# Altium PCB RX_Banda_Aerea_v5.PcbDoc
Units mm, origin at the board's own origin, x right, y up, seen from the top; angles counter-clockwise.
Board outline 51.56 x 51.69 mm, 2 copper layers (Top Layer, Bottom Layer), stack 1.571 mm thick; 89 components, 45 nets, 214 pads, 83 vias.
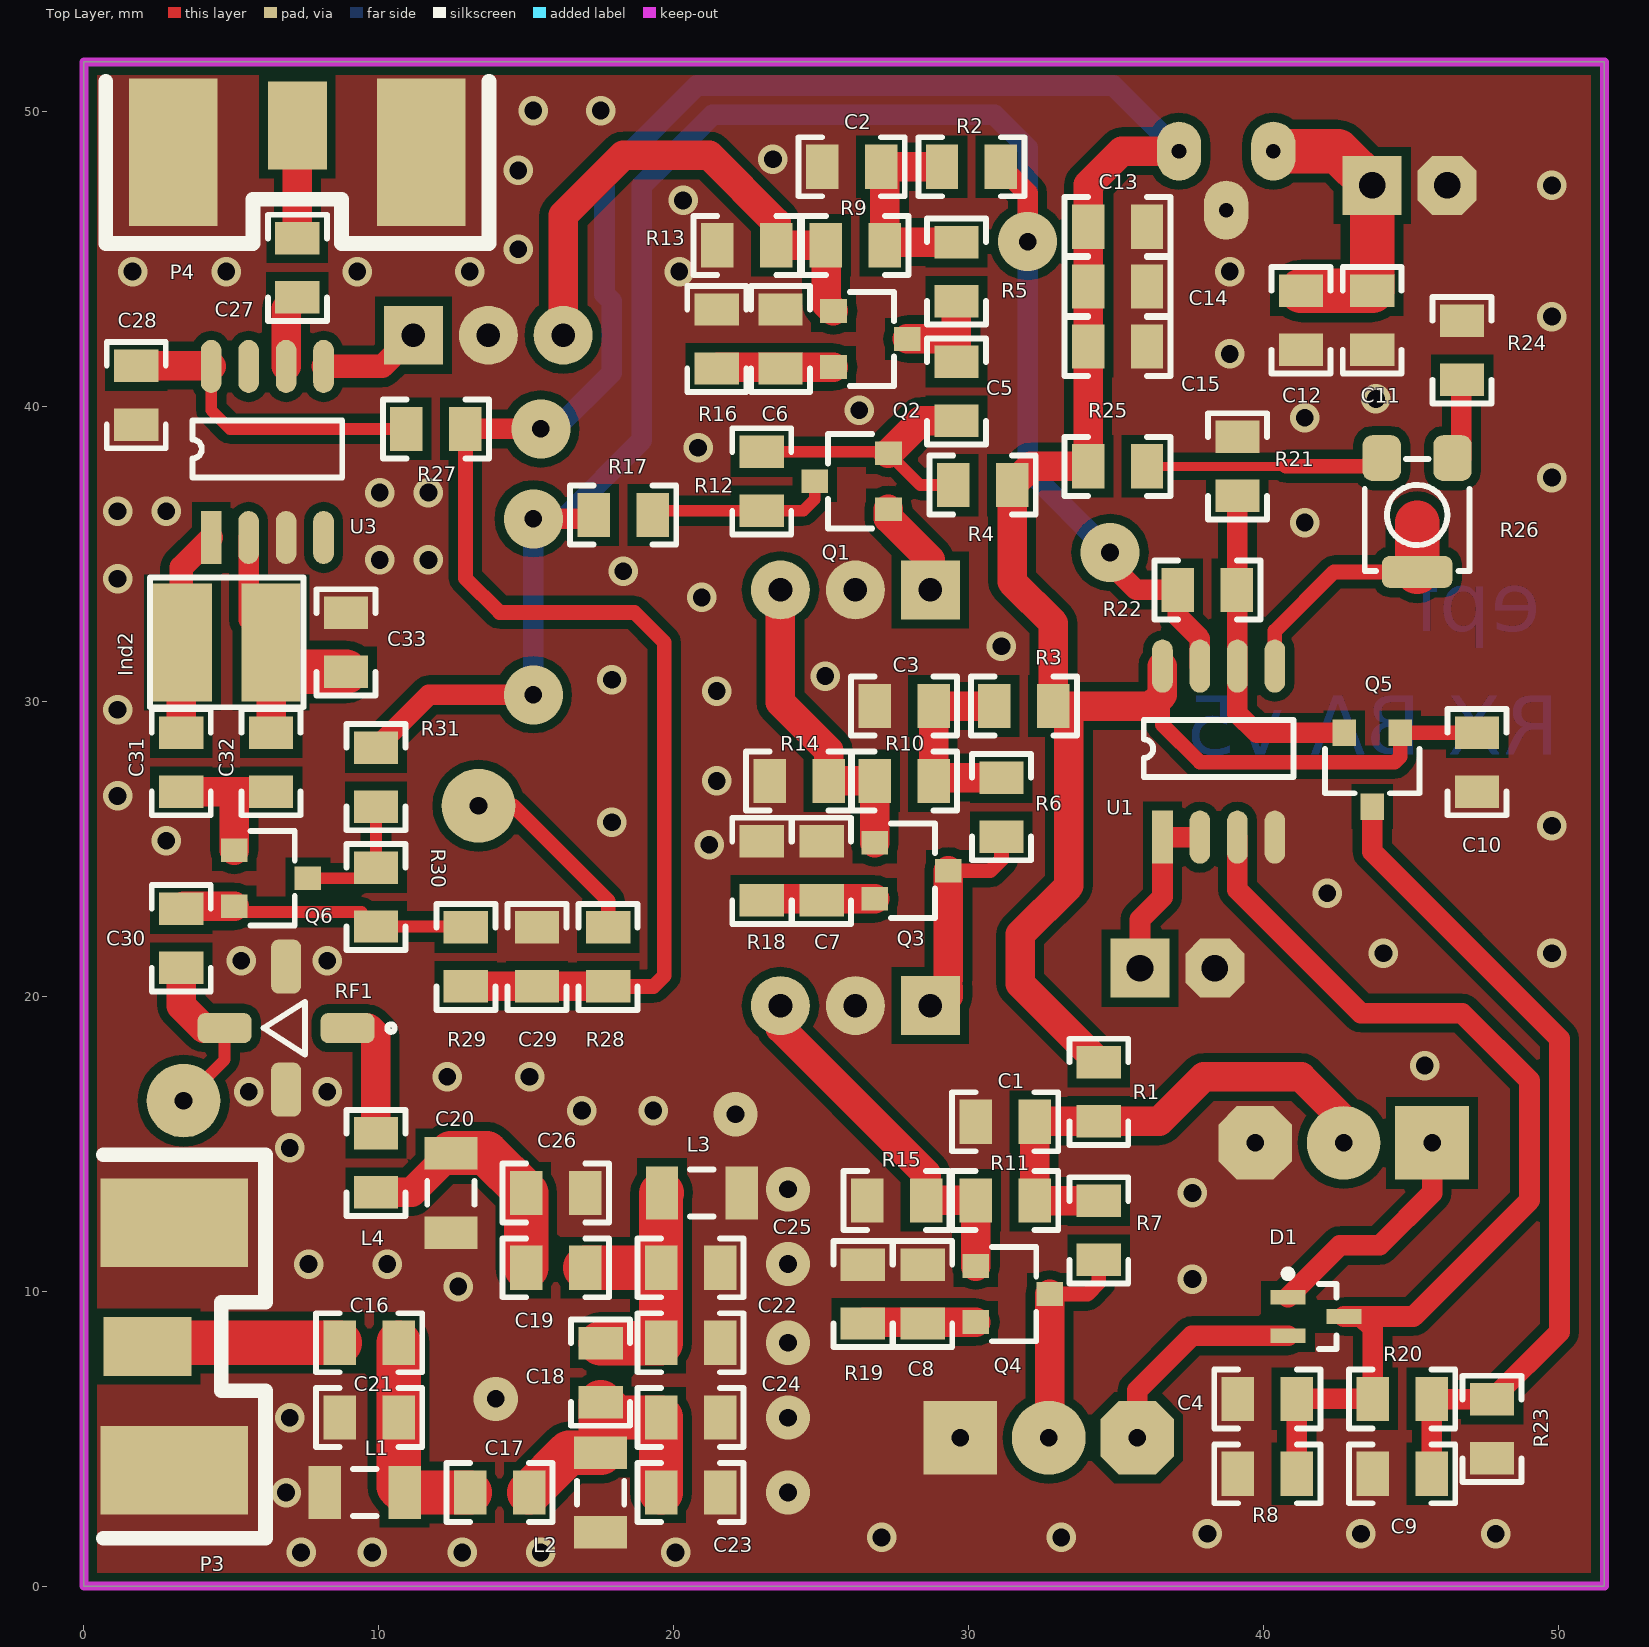
[diagram p0: Top Layer view]
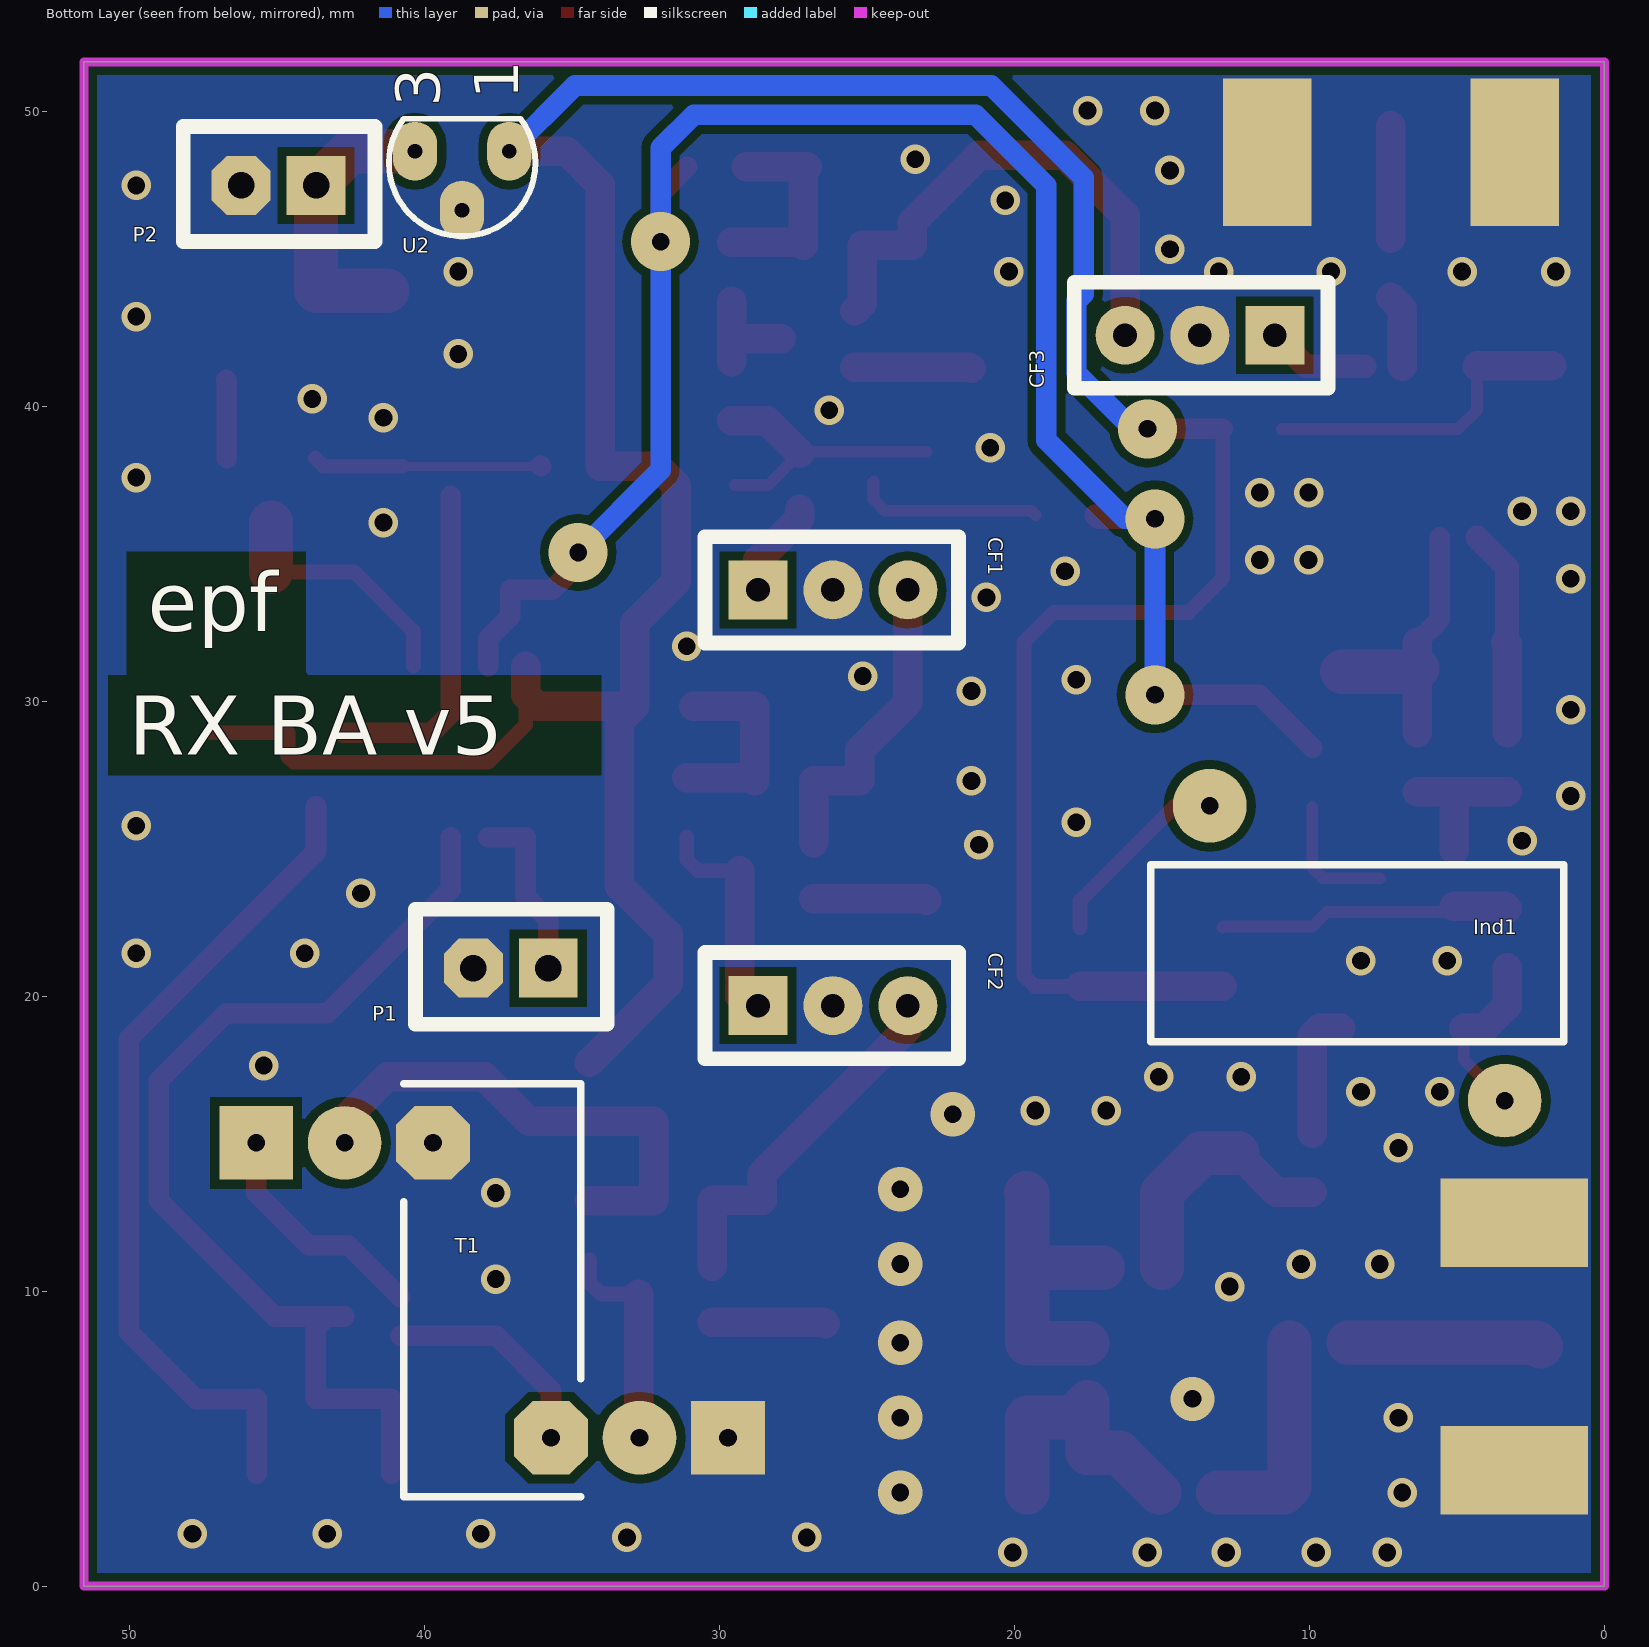
[diagram p1: Bottom Layer view, seen from below]

## Layer stack, top to bottom
Top Layer: signal copper 0.0356
Dielectric: core 1.5, FR-4, Dk 4.8
Bottom Layer: signal copper 0.0356

## Board outline
0,0 51.562,0 51.562,51.689 0,51.689

## Design rules (kind name [scope] priority, off if disabled: settings)
Clearance [All] p1: gap=0.3
Height [All] p1: minheight=0 maxheight=90 prefheight=12.7
PolygonConnect [All] p1: connectstyle=Direct reliefconductorwidth=0.254 reliefentries=4 polygonreliefangle="90 Angle"
RoomDefinition RXBA [InComponentClass('Components Class 1')] p1: confinementstyle=ConfineIn formatcopy=TRUE lockcomponents=TRUE outline -23.749,62.611 52.832,62.611 52.832,-0.889 -23.749,-0.889
RoutingVias [All] p1: holewidth=0.635 width=2 viastyle="Through Hole" minholewidth=0.5 minwidth=1.27 maxholewidth=1 maxwidth=3
SilkToSilkClearance [All] p1: silktosilkclearance=0
SilkscreenOverComponentPads [All] p1: minsilkscreentomaskgap=0
SolderMaskExpansion [All] p1: expansion=0.102
TestPointUsage FabricationTestPointUsage [All] p1: valid=0 allowmultiple=FALSE
Testpoint FabricationTestpoint [All] p1: side=3 testpointundercomponent=TRUE minsize=1.016 maxsize=2.54 preferedsize=1.524 minholesize=0 maxholesize=1.016 preferedholesize=0.813 testpointgrid=0.025 style=297 order=0-112345678
Width [All] p1: maxlimit=3 minlimit=0.3 preferedwidth=1
21 further rules are at their usual default settings.

## Classes and differential pairs
component class Ampli_FI_10_7MHz: C1 C2 C3 C4 C5 C6 C7 C8 C9 C10 C11 C12 C13 C14 C15 CF1 CF2 CF3 D1 P1 P2 Q1 Q2 Q3 Q4 Q5 R1 R2 R3 R4 R5 R6 R7 R8 R9 R10 R11 R12 R13 R14 R15 R16 R17 R18 R19 R20 R21 R22 R23 R24 R25 R26 T1 U1 U2
component class FiltroRF: C16 C17 C18 C19 C20 C21 C22 C23 C24 C25 C26 C27 C28 C29 C30 C31 C32 C33 Ind1 Ind2 L1 L2 L3 L4 P3 P4 Q6 R27 R28 R29 R30 R31 RF1 U3

## Components (designator, comment, footprint, x,y, rotation, side; value= is the part's Value field where it differs from the comment)
C1 "Capacitor" 0805_CAP 31.242,15.748 r0 top
C2 "Capacitor" 0805_CAP 26.035,48.133 r180 top
C3 "Capacitor" 0805_CAP 27.813,29.845 r180 top
C4 "Capacitor" 0805_CAP 40.132,6.35 r0 top
C5 "Capacitor" 0805_CAP 29.591,40.513 r90 top
C6 "Capacitor" 0805_CAP 23.622,42.291 r90 top
C7 "Capacitor" 0805_CAP 25.019,24.257 r90 top
C8 "Capacitor" 0805_CAP 28.448,9.906 r270 top
C9 "Capacitor" 0805_CAP 44.704,3.81 r0 top
C10 "Capacitor" 0805_CAP 47.244,27.94 r90 top
C11 "Capacitor" 0805_CAP 43.688,42.926 r90 top
C12 "Capacitor" 0805_CAP 41.275,42.926 r90 top
C13 "Capacitor" 0805_CAP 35.052,46.101 r180 top
C14 "Capacitor" 0805_CAP 35.052,44.069 r180 top
C15 "Capacitor" 0805_CAP 35.052,42.037 r180 top
C16 "Capacitor" 0805_CAP 9.675,8.255 r180 top
C17 "Capacitor" 0805_CAP 14.097,3.175 r180 top
C18 "Capacitor" 0805_CAP 17.526,7.239 r90 top
C19 "Capacitor" 0805_CAP 16.002,10.795 r180 top
C20 "Capacitor" 0805_CAP 9.906,14.351 r270 top
C21 "Capacitor" 0805_CAP 9.675,5.715 r180 top
C22 "Capacitor" 0805_CAP 20.574,8.255 r180 top
C23 "Capacitor" 0805_CAP 20.574,3.175 r180 top
C24 "Capacitor" 0805_CAP 20.574,5.715 r180 top
C25 "Capacitor" 0805_CAP 20.574,10.795 r180 top
C26 "Capacitor" 0805_CAP 16.002,13.335 r0 top
C27 "Capacitor" 0805_CAP 7.239,44.704 r90 top
C28 "Capacitor" 0805_CAP 1.778,40.386 r90 top
C29 "Capacitor" 0805_CAP 15.367,21.336 r270 top
C30 "Capacitor" 0805_CAP 3.302,21.971 r270 top
C31 "Capacitor" 0805_CAP 3.302,27.94 r270 top
C32 "Capacitor" 0805_CAP 6.35,27.94 r90 top
C33 "Capacitor" 0805_CAP 8.89,32.004 r90 top
CF1 "Filtro_ceramico" Filter_10_7 28.702,33.782 r180 bottom
CF2 "Filtro_ceramico" Filter_10_7 28.702,19.685 r180 bottom
CF3 "Filtro_ceramico" Filter_10_7 11.176,42.418 r0 bottom
D1 "BAS70-05W" SOT323_N 41.783,9.144 r0 top
Ind1 "Ind2" NTH12_2 8.382,21.463 r0 bottom
Ind2 "Ind2" Ind_3mm 6.35,32.004 r180 top
L1 "Inductor" INDC3216AL 9.525,3.175 r0 top
L2 "Inductor" INDC3216AL 17.526,3.175 r90 top
L3 "Inductor" INDC3216AL 20.955,13.335 r180 top
L4 "Inductor" INDC3216AL 12.446,13.335 r90 top
P1 "Header2" Header2Macho 35.814,20.955 r0 bottom
P2 "Header2" Header2Hembra 43.688,47.498 r0 bottom
P3 "SMA2" SMAL_Antena 2.159,8.128 r90 top
P4 "SMA2" SMAL2 7.239,49.53 r0 top
Q1 "PMBF4391" SOT23 26.035,37.465 r90 top
Q2 "BFS17" SOT23 26.67,42.291 r270 top
Q3 "BFS17" SOT23 28.067,24.257 r270 top
Q4 "BFS17" SOT23 31.496,9.906 r270 top
Q5 "PMBF4391" SOT23 43.688,27.686 r180 top
Q6 "PMBF4391" SOT23 6.35,24.003 r270 top
R1 "Resistor" 0805_RES 34.417,16.764 r270 top
R2 "Resistor" 0805_RES 30.099,48.133 r180 top
R3 "Resistor" 0805_RES 31.877,29.845 r180 top
R4 "Resistor" 0805_RES 30.48,37.338 r180 top
R5 "Resistor" 0805_RES 29.591,44.577 r270 top
R6 "Resistor" 0805_RES 31.115,26.416 r270 top
R7 "Resistor" 0805_RES 34.417,12.065 r270 top
R8 "Resistor" 0805_RES 40.132,3.81 r180 top
R9 "Resistor" 0805_RES 26.162,45.466 r180 top
R10 "Resistor" 0805_RES 27.813,27.305 r180 top
R11 "Resistor" 0805_RES 31.242,13.081 r180 top
R12 "Resistor" 0805_RES 22.987,37.465 r270 top
R13 "Resistor" 0805_RES 22.479,45.466 r180 top
R14 "Resistor" 0805_RES 24.257,27.305 r180 top
R15 "Resistor" 0805_RES 27.559,13.081 r180 top
R16 "Resistor" 0805_RES 21.463,42.291 r90 top
R17 "Resistor" 0805_RES 18.288,36.322 r180 top
R18 "Resistor" 0805_RES 22.987,24.257 r90 top
R19 "Resistor" 0805_RES 26.416,9.906 r90 top
R20 "Resistor" 0805_RES 44.704,6.35 r180 top
R21 "Resistor" 0805_RES 39.116,37.973 r270 top
R22 "Resistor" 0805_RES 38.1,33.782 r180 top
R23 "Resistor" 0805_RES 47.752,5.334 r270 top
R24 "Resistor" 0805_RES 46.736,41.91 r90 top
R25 "Resistor" 0805_RES 35.052,37.973 r0 top
R26 "Pot" POT_SMD 45.212,36.322 r180 top
R27 "Resistor" 0805_RES 11.938,39.243 r180 top
R28 "Resistor" 0805_RES 17.78,21.336 r270 top
R29 "Resistor" 0805_RES 12.954,21.336 r90 top
R30 "Resistor" 0805_RES 9.906,23.368 r270 top
R31 "Resistor" 0805_RES 9.906,27.432 r270 top
RF1 "MAR-1SM" WW107 6.858,18.923 r180 top
T1 "Transformer" NTH12_V_3Ind_2 37.719,10.033 r180 bottom
U1 "MC1458D" SO-8_2 36.576,25.4 r90 top
U2 "LM78L09ACZ" TO92 38.735,48.26 r90 bottom
U3 "SA602" SO-8_2 4.318,35.56 r90 top

## Footprints (in the part's own frame and the unit in brackets; to place one, negate y for a bottom-side part, rotate by r counter-clockwise, add the part's x,y. Pads: shape width x height; smd on the part's side, far side on the other; paste and mask are expansions set on the pad)
0805_CAP [mm]
  rect 1.1x1.5 smd: 1(-1,0) 2(1,0)
  silkscreen extent -1.8,-1 1.8,1, body extent -1,-0.62 1,0.63, height 0.78
0805_RES [mm]
  rect 1.1x1.5 smd: 1(-1,0) 2(1,0)
  silkscreen extent -1.8,-1 1.8,1, body extent -1,-0.62 1,0.63, height 0.78
Filter_10_7 [mm]
  rect 2x2 hole 0.8: 1(0,0)
  round 2 hole 0.8: 2(2.54,0) 3(5.08,0)
  silkscreen extent -1.8,-1.8 6.8,1.8
Header2Hembra [mm]
  rect 2x2 hole 0.9: 1(0,0)
  oct 2x2 hole 0.9: 2(2.54,0)
  silkscreen extent -2,-2 4.5,1.9, body extent -1.3,-1.3 3.78,1.24, height 6.02
Header2Macho [mm]
  rect 2x2 hole 0.9: 1(0,0)
  oct 2x2 hole 0.9: 2(2.54,0)
  silkscreen extent -2,-2 4.5,1.9, body extent -1.18,-1.21 3.82,1.29, height 8.2
Ind_3mm [mm]
  rect 2x4 smd: 1(0,0) 2(3,0)
  silkscreen extent -1.1,-2.2 4.1,2.2, body extent -0.2,-1.95 3.2,1.95, height 3.95
INDC3216AL [mm] "Chip Inductor, Body 3.2x1.6mm, IPC High Density"
  rect 1.1x1.8 smd: 1(-1.35,0) 2(1.35,0)
  silkscreen extent -0.4,-0.8 0.4,0.8, body extent -1.7,-0.9 1.7,0.9, height 0.55
NTH12_2 [mm]
  round 2.5 hole 0.6: 1(-5,5) 2(5,-5)
  silkscreen extent -7,-3 7,3
NTH12_V_3Ind_2 [mm]
  round 2.5 hole 0.6: 1(-5,5) 2(5,-5)
  rect 2.5x2.5 hole 0.6: 3(-8,5) 4(8,-5)
  oct 2.5x2.5 hole 0.6: 5(-2,5) 6(2,-5)
  silkscreen extent -3,-7 3,7
POT_SMD [mm]
  rrect50% 1.3x1.55 smd: 1(-1.2,-1.93) 2(1.2,-1.93)
  rrect50% 2.39x1.09 smd: 3(0,1.93)
  silkscreen extent -1.78,-1.91 1.78,1.91, body extent -1.52,-1.55 1.52,1.68, height 2
SMAL2 [mm]
  rect 3x5 smd: 0(-4.2,-0.9) 0(4.2,-0.9)
  rect 3x5 smd far side: 0(-4.2,-0.9) 0(4.2,-0.9)
  rect 2x3 smd: 1(0,0)
  silkscreen extent -6.5,-4 6.5,1.5, body extent -4.76,-2.97 4.76,10.86, height 4.06
SMAL_Antena [mm]
  rect 3x5 smd: 0(-4.2,-0.9) 0(4.2,-0.9)
  rect 3x5 smd far side: 0(-4.2,-0.9) 0(4.2,-0.9)
  rect 2x3 smd: 1(0,0)
  silkscreen extent -6.5,-4 6.5,1.5, body extent -4.76,-2.97 4.76,24.09, height 42.25
SO-8_2 [mm]
  rect 1.8x0.7 smd: 1(0,0)
  oval 1.8x0.7 smd: 2(0,-1.27) 3(0,-2.54) 4(0,-3.81) 5(5.8,-3.81) 6(5.8,-2.54) 7(5.8,-1.27) 8(5.8,0)
  silkscreen extent 2.03,-4.44 3.97,0.64, body extent -0.09,-4.38 5.9,0.52, height 1.6
SOT23 [mm]
  rect 0.8x0.9 smd: 1(-0.95,-1.25) 2(0.95,-1.25) 3(0,1.25)
  silkscreen extent -1.6,-0.7 1.6,0.8, body extent -1.5,-1.25 1.5,1.25, height 1.05
SOT323_N [mm] "SOT323, 3-Leads, Body 2.0x1.3mm, Pitch 0.65mm, Lead Span 2.1mm, IPC Medium Density"
  rect 1.2x0.5 smd: 1(-0.95,0.65) 2(-0.95,-0.65) 3(0.95,0)
  silkscreen extent -1.07,-1.1 0.7,1.57, body extent -0.7,-1.1 0.7,1.1, height 1.1
TO92 [mm] "TO, Flat Index; 3 In-Line, Axial Leads; Body Dia. 4.5mm; Leads 0.51 x 0.48 mm (max)"
  oval 2x1.5 hole 0.5: 1(0.4,-1.6) 2(-1.6,0) 3(0.4,1.6)
  silkscreen extent -2.48,-2.48 1.5,2.48
WW107 [mm] "MAR-1"
  rrect50% 1.83x1.02 smd: 1(-2.085,0) 3(2.085,0)
  rrect50% 1.02x1.83 smd: 2(0,-2.085) 4(0,2.085)
  silkscreen extent -3.68,-0.89 0.76,0.89, body extent -1.09,-1.09 1.09,1.09, height 1.52

## Part data
C1 C2 C3 C4 C5 C6 C7 C8 C9 C10 C11 C12 C13 C14 C15 C16 C17 C18 C19 C20 C21 C22 C23 C24 C25 C26 C27 C28 C29 C30 C31 C32 C33: library part Cap
CF1 CF2 CF3: library part Filter_10_7
D1: "Schottky Barrier Double Diode"
P3 P4: "BNC Elbow Connector"
Q1 Q5 Q6: "N-channel Silicon Junction Field-effect Transistor"
Q2 Q3 Q4: "NPN 1 GHz Wideband Transistor"
R1 R2 R3 R4 R5 R6 R7 R8 R9 R10 R11 R12 R13 R14 R15 R16 R17 R18 R19 R20 R21 R22 R23 R24 R25 R27 R28 R29 R30 R31: library part Res
T1: library part Transformador3, "Transformador 3 bobinas"
U1: "Dual Operational Amplifier, Internally Compensated"
U2: "3-Terminal Positive Regulators"
U3: library part SA602A, "Mezclador 500MHz"

## Via types
v1: diameter 1, hole 0.6, Top Layer to Bottom Layer, 71 vias
v2: diameter 1.5, hole 0.6, Top Layer to Bottom Layer, 7 vias
v3: diameter 2, hole 0.6, Top Layer to Bottom Layer, 5 vias

## Nets (pads, with @x,y where several pads share a name; then routed paths per layer and width w, separated by ;. In a path a pad name is that pad's centre, name@x,y a point inside that pad or via, vN(x,y) a via of type N, cw(c..) or ccw(c..) an arc to the next point about the centre after c; other vN are vias at no path point)
AUDIO: C4.2 D1.3 R8.1 R20.2 U1.3 | length 35
  Top Layer w0.7: U1.3 39.116,23.622 43.307,19.431 46.736,19.431 49.022,17.145 49.022,13.081 45.085,9.144 D1.3 43.307,9.144 43.704,8.747 R20.2 C4.2 R8.1
AUDIO_BUFF: P1.1 U1.1 U1.2 | length 6
  Top Layer w0.7: P1.1 35.814,22.606 36.576,23.368 U1.1 U1.2
CAG: R2.1 R17.2 R22.2 R31.1 U1.7 | length 65.8
  Top Layer w0.7: R31.1 11.7,30.226 v3(15.24,30.226) ; v3(15.24,36.195) 17.161,36.195 R17.2 ; R2.1 32.004,47.228 v3(32.004,45.593) ; v3(34.798,35.052) 34.798,34.671 35.687,33.782 R22.2 37.1,32.877 37.846,32.131 U1.7
  Bottom Layer w0.7: v3(15.24,30.226) v3(15.24,36.195) 16.256,36.195 18.923,38.862 18.923,47.498 21.314,49.889 30.883,49.889 32.004,48.768 v3(32.004,45.593) 32.004,37.846 v3(34.798,35.052)
FI: CF3.1 U3.5 | length 3.5
  Top Layer w0.8: U3.5 10.118,41.36 CF3.1
GND: C1.1 C2.2 C3.2 C4.1 C6.2 C7.2 C8.1 C9.1 C10.1 C11.1 C12.1 C13.1 C14.1 C15.1 C21.2 C22.1 C23.1 C24.1 C25.1 C26.2 C28.1 C29.1 C33.2 CF1.2 CF2.2 CF3.2 L1.1 L2.1 L3.1 L4.1 P1.2 P2.2 P3.0 P4.0 R8.2 R13.2 R14.2 R15.2 R16.2 R18.2 R19.2 R21.1 R23.2 R24.2 RF1.2 RF1.4 T1.4 T1.5 U1.4 U2.2 U3.3
  other v1: 7.366,1.143 9.779,1.143 12.827,1.143 15.494,1.143 20.066,1.143 27.051,1.651 33.147,1.651 38.1,1.778 43.307,1.778 47.879,1.778 6.858,3.175 6.985,5.715 12.7,10.16 37.592,10.414 7.62,10.922 10.287,10.922 37.592,13.335 6.985,14.859 16.891,16.129 19.304,16.129 5.588,16.764 8.255,16.764 12.319,17.272 15.113,17.272 45.466,17.653 5.334,21.209 8.255,21.209 44.069,21.463 49.784,21.463 42.164,23.495 21.209,25.146 2.794,25.273 49.784,25.781 17.907,25.908 1.143,26.797 21.463,27.305 1.143,29.718 21.463,30.353 17.907,30.734 25.146,30.861 31.115,31.877 20.955,33.528 1.143,34.163 18.288,34.417 10.033,34.798 11.684,34.798 41.402,36.068 1.143,36.449 2.794,36.449 10.033,37.084 11.684,37.084 49.784,37.592 20.828,38.608 41.402,39.624 26.289,39.878 43.815,40.259 38.862,41.783 49.784,43.053 1.651,44.577 4.826,44.577 9.271,44.577 13.081,44.577 20.193,44.577 38.862,44.577 14.732,45.339 20.32,46.99 49.784,47.498 14.732,48.006 23.368,48.387 15.24,50.038 17.526,50.038
  other v2: 23.876,3.175 23.876,5.715 13.97,6.35 23.876,8.255 23.876,10.922 23.876,13.462 22.098,16.002
NetC1_2: C1.2 R1.2 R7.1 R11.1 T1.1 | length 17.4
  Top Layer w1: R7.1 32.258,13.065 R11.1 C1.2 32.258,15.764 R1.2 36.465,15.764 37.973,17.272 41.275,17.272 42.719,15.828 T1.1
NetC2_1: C2.1 R2.2 R5.1 R9.1 | length 7.3
  Top Layer w1: R2.2 C2.1 27.162,48.006 R9.1 27.273,45.577 R5.1
NetC3_1: C3.1 R3.2 R6.1 R10.1 | length 7
  Top Layer w1: R3.2 C3.1 R10.1 28.924,27.416 R6.1
NetC5_1: C5.1 Q1.2 R4.2 R12.1 | length 9.7
  Top Layer w0.4: R12.1 27.235,38.465 Q1.2 28.362,37.338 R4.2
  Top Layer w1: Q1.2 28.383,39.513 C5.1
NetC5_2: C5.2 Q2.3 R5.2 | length 3.7
  Top Layer w1: Q2.3 29.591,42.291 ; C5.2 29.591,42.291 ; R5.2 29.591,42.291
NetC6_1: C6.1 Q2.2 R16.1 | length 4
  Top Layer w1: R16.1 21.513,41.341 Q2.2
NetC7_1: C7.1 Q3.2 R18.1 | length 3.9
  Top Layer w1: R18.1 23.037,23.307 Q3.2
NetC8_2: C8.2 Q4.2 R19.1 | length 3.9
  Top Layer w1: R19.1 26.466,8.956 Q4.2
NetC9_2: C9.2 Q5.3 R20.1 R23.1 | length 28.3
  Top Layer w0.7: Q5.3 43.688,24.912 50.038,18.562 50.038,8.62 R23.1 45.72,6.334 R20.1 C9.2
NetC11_2: C11.2 C12.2 P2.1 U2.3 | length 9.8
  Top Layer w1.5: U2.3 42.526,48.66 P2.1 C11.2 C12.2
NetC16_1: C16.1 C17.2 C21.1 L1.2 | length 7.4
  Top Layer w1.5: C16.1 C21.1 10.675,3.375 L1.2 C17.2
NetC17_1: C17.1 C18.1 C23.2 C24.2 L2.2 | length 9.5
  Top Layer w1.5: C17.1 16.447,4.525 L2.2 C18.1 18.05,5.715 C24.2 C23.2
NetC18_2: C18.2 C19.1 C22.2 C25.2 L3.2 | length 9.7
  Top Layer w1.5: C19.1 C25.2 ; C18.2 19.558,8.239 C22.2 C25.2 ; L3.2 19.574,13.304 C25.2
NetC19_2: C19.2 C20.2 C26.1 L4.2 | length 8.7
  Top Layer w1: C20.2 11.112,13.351 L4.2
  Top Layer w1.5: L4.2 13.652,14.685 C26.1 C19.2
NetC27_1: C27.1 U3.6 | length 2.5
  Top Layer w1: U3.6 6.858,43.323 C27.1
NetC27_2: C27.2 P4.1 | length 3.8
  Top Layer w1: C27.2 P4.1
NetC28_2: C28.2 R27.2 U3.8 | length 10.9
  Top Layer w0.4: U3.8 4.318,39.878 4.953,39.243 R27.2
  Top Layer w1: C28.2 4.292,41.386 U3.8
NetC30_1: C30.1 Q6.2 R29.2 R30.2 | length 10
  Top Layer w0.4: Q6.2 5.293,22.86 9.414,22.86 R30.2 12.922,22.368 R29.2
  Top Layer w1: C30.1 3.384,23.053 Q6.2
NetC30_2: C30.2 Ind1.1 RF1.3 | length 6.1
  Top Layer w0.4: Ind1.1 4.773,17.854 RF1.3
  Top Layer w1: C30.2 3.302,19.685 4.064,18.923 RF1.3
NetC31_1: C31.1 Ind2.2 U3.1 | length 7.1
  Top Layer w0.8: Ind2.2@3.302,31.956 3.302,34.544 U3.1
  Top Layer w1: C31.1 3.302,31.956 Ind2.2
NetC31_2: C31.2 C32.1 Q6.1 | length 5.1
  Top Layer w1: C31.2 5.207,26.94 ; Q6.1 5.1,26.833 5.207,26.94 ; C32.1 5.207,26.94
NetC32_2: C32.2 C33.1 Ind2.1 U3.2 | length 9.5
  Top Layer w0.7: U3.2 5.588,32.766 Ind2.1
  Top Layer w1: C32.2 6.35,31.115 Ind2.1
  Top Layer w1.5: Ind2.1@6.35,31.115 6.461,31.004 C33.1
NetCF1_1: CF1.1 Q1.1 | length 3.3
  Top Layer w1: Q1.1 27.285,36.215 28.702,34.798 CF1.1
NetCF1_3: CF1.3 Q3.1 R10.2 R14.1 | length 10.8
  Top Layer w1: CF1.3 23.622,29.972 25.257,28.337 R14.1 R10.2 26.817,27.301 Q3.1
NetCF2_1: CF2.1 Q3.3 R6.2 | length 7.9
  Top Layer w0.5: Q3.3 30.734,24.257 31.115,24.638 R6.2
  Top Layer w0.7: CF2.1 29.317,20.3 CF2.1@29.317,20.574
  Top Layer w1: CF2.1@29.317,20.006 CF2.1@29.317,20.3 ; CF2.1@29.317,20.574 Q3.3
NetCF2_3: CF2.3 Q4.1 R11.2 R15.1 | length 12.6
  Top Layer w1: CF2.3 23.622,18.923 28.559,13.986 R15.1 R11.2 30.246,13.077 Q4.1
NetCF3_3: CF3.3 Q2.1 R9.2 R13.1 | length 17.9
  Top Layer w1: CF3.3 16.256,46.482 18.288,48.514 21.209,48.514 23.479,46.244 R13.1 R9.2 25.172,45.456 25.172,43.489 Q2.1
NetD1_1: D1.1 T1.3 | length 8.1
  Top Layer w0.7: D1.1 42.596,11.557 43.942,11.557 45.719,13.334 T1.3
NetD1_2: D1.2 T1.6 | length 7.5
  Top Layer w0.7: T1.6 35.719,6.636 37.577,8.494 D1.2
NetInd1_2: Ind1.2 R28.1 | length 6.6
  Top Layer w0.5: Ind1.2 14.558,26.463 17.78,23.241 R28.1
NetQ1_3: Q1.3 R12.2 R17.1 | length 6.3
  Top Layer w0.4: R17.1 19.431,36.465 R12.2 24.4,36.465 24.785,36.85 Q1.3
NetQ4_3: Q4.3 R7.2 T1.2 | length 7.5
  Top Layer w0.5: Q4.3 34.036,9.906 34.417,10.287 R7.2
  Top Layer w1: T1.2 32.746,5.06 Q4.3
NetQ5_2: Q5.2 R21.2 R22.1 U1.6 | length 11.3
  Top Layer w0.7: R21.2 U1.6 39.116,29.591 39.771,28.936 Q5.2
NetQ6_3: Q6.3 R30.1 R31.2 | length 4.5
  Top Layer w0.4: Q6.3 9.541,24.003 R30.1 R31.2
NetR24_1: R24.1 R26.1 | length 2.7
  Top Layer w0.7: R26.1@46.712,38.252 46.712,40.886 R24.1
NetR25_2: R25.2 R26.2 | length 7.8
  Top Layer w0.3: R25.2 40.767,37.973
  Top Layer w0.5: 40.767,37.973 43.433,37.973 R26.2@43.712,38.252
  Top Layer w0.7: R25.2 R25.2@36.077,37.998
NetR26_3: R26.3 U1.5 | length 8.5
  Top Layer w0.5: U1.5 40.386,32.385 42.393,34.392 R26.3
  Top Layer w1.5: R26.3 45.212,36.068
RF_FILT: C20.1 RF1.1 | length 4.4
  Top Layer w1: RF1.1 9.652,18.923 9.906,18.669 C20.1
RF_IN: C16.2 P3.1 | length 6.6
  Top Layer w1.5: P3.1 2.286,8.255 C16.2
VCC: C10.2 C13.2 C14.2 C15.2 C29.2 Q5.1 R1.1 R3.1 R4.1 R25.1 R27.1 R28.2 R29.1 U1.8 U2.1 | length 122.1
  Top Layer w0.5: R27.1 12.938,34.179 14.097,33.02 18.669,33.02 19.685,32.004 19.685,20.701 19.32,20.336 R28.2 ; U1.8 36.576,29.21 37.85,27.936 44.446,27.936 44.638,28.128 Q5.1 44.642,28.94 C10.2
  Top Layer w0.7: R27.1 v3(15.494,39.243)
  Top Layer w1: R29.1 C29.2 R28.2 ; R1.1 31.75,20.431 31.75,22.098 33.401,23.749 33.401,29.321 R3.1 ; U1.8 36.576,30.226 36.195,29.845 R3.1 ; U2.1 35.198,48.66 34.052,47.514 C13.2 C14.2 C15.2 R25.1 32.115,37.973 R4.1 31.48,34.052 32.877,32.655 R3.1
  Bottom Layer w0.7: v3(15.494,39.243) 16.002,39.243 17.907,41.148 17.907,43.561 17.653,43.815 17.653,47.752 20.79,50.889 34.906,50.889 U2.1
pads on no net: U3.4 U3.7

## Polygon pours and split planes (outlines as drawn)
GND on Top Layer "TGND" (solid, remove dead copper, pour order 1000): 0,0 0,51.689 51.435,51.689 51.562,51.562 51.562,0.254
GND on Bottom Layer "BGND" (solid, remove dead copper, pour order 1001): 0,0 0,51.689 51.562,51.689 51.562,0

## Keep-outs
Keep-Out Layer:
  the board outline again, w0.3

## Other copper
Bottom Layer:
  text "epf" at 49.403,32.385 h2
  text "RX BA v5" at 50.038,28.194 h2

## Silkscreen, mask and mechanical layers (free items; w line width, h text height)
Bottom Overlay:
  text "epf" at 49.403,32.385 h2
  text "RX BA v5" at 50.038,28.194 h2

## Dimensions
0,0 to 51.562,0 on Mechanical 1
0,0 to 0,51.689 on Mechanical 1

## Text inside footprints (layer, text, board x,y; h text height)
U2: Bottom Overlay "3" at 39.497,50.165 h1.5 r270; Bottom Overlay "1" at 36.83,50.419 h1.5 r270